# Altium PCB Insoladora.PcbDoc
Units mil, origin at the board's own origin, x right, y up, seen from the top; angles counter-clockwise.
Board outline 5900 x 4500 mil, 2 copper layers (Top Layer, Bottom Layer); 68 components, 52 nets, 136 pads, 4 vias.
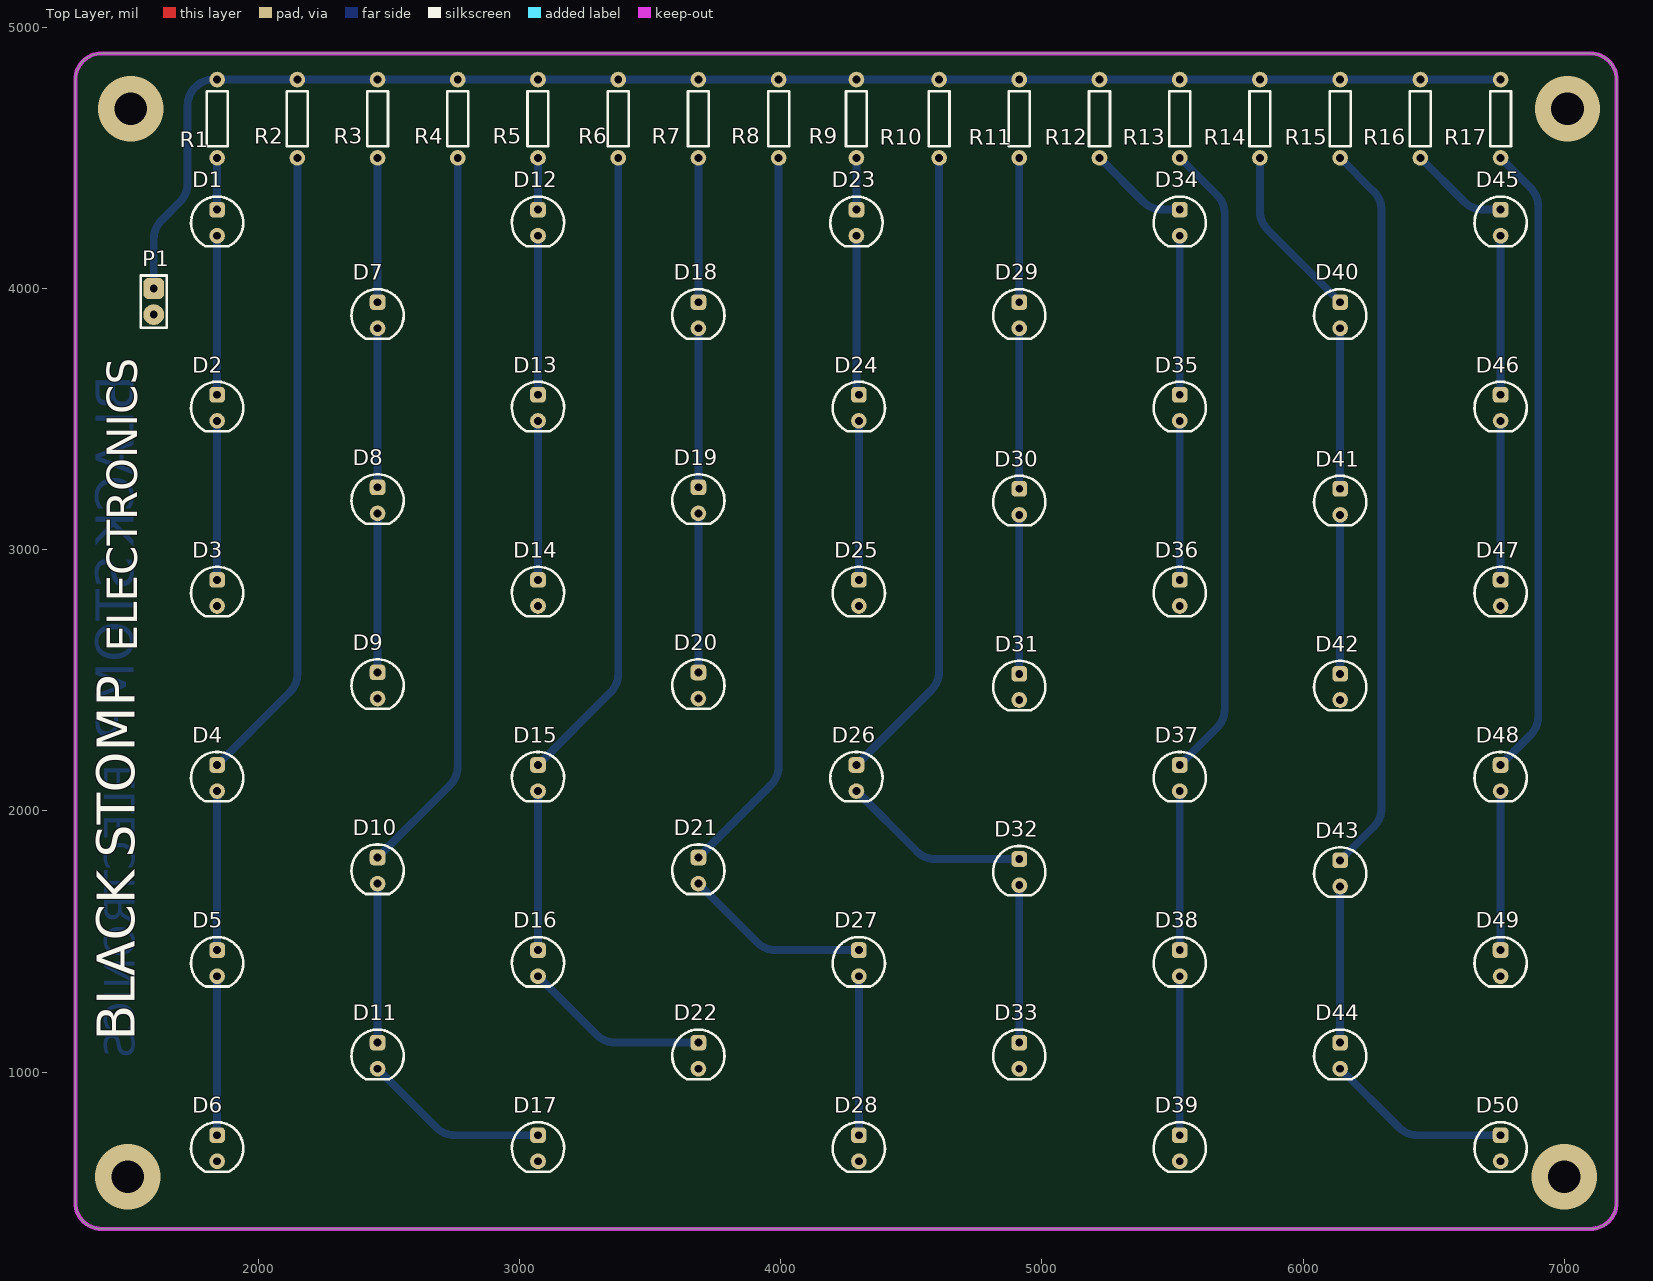
[diagram p0: Top Layer view]
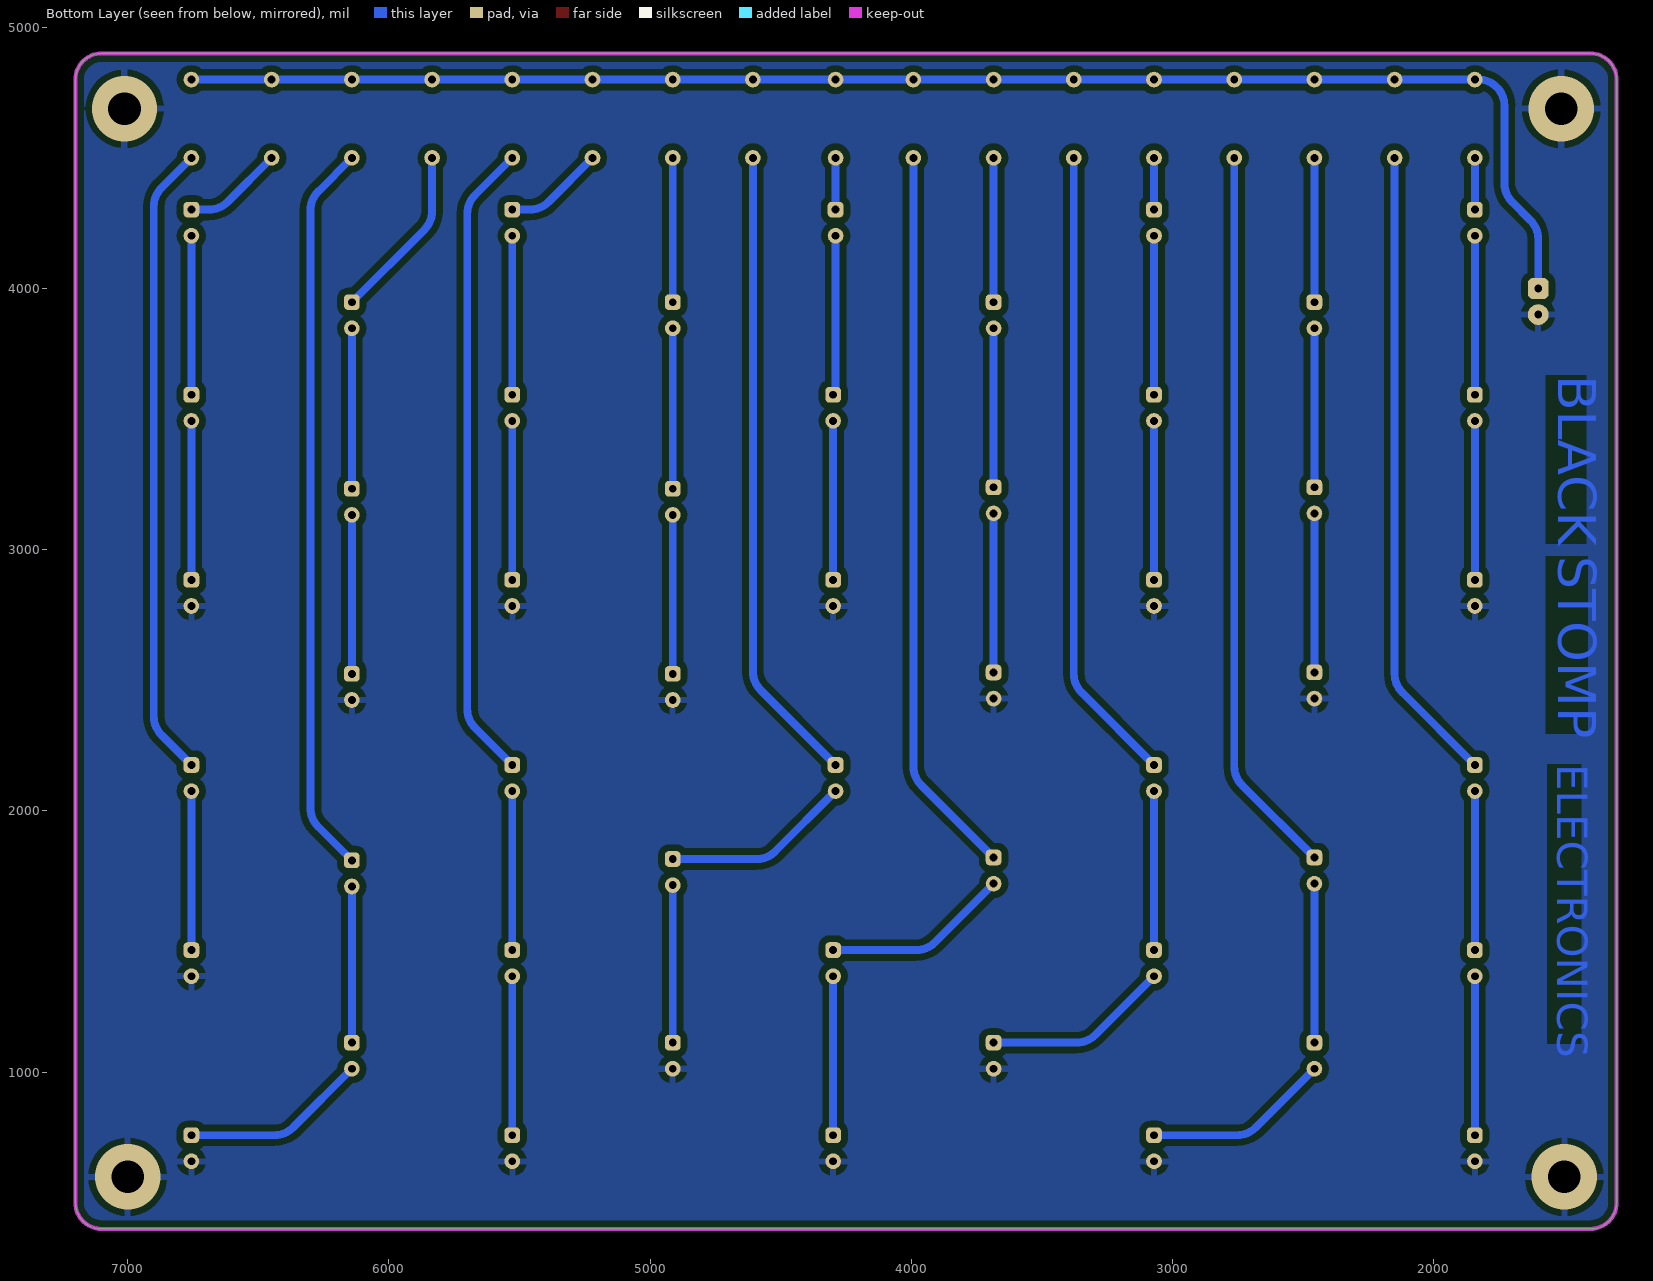
[diagram p1: Bottom Layer view, seen from below]

## Layer stack, top to bottom
Top Solder: solder mask 0.4, Solder Resist, Dk 3.5
Top Layer: signal copper 1.4
Dielectric 1: dielectric 12.6, FR-4, Dk 4.8
Bottom Layer: signal copper 1.4
Bottom Solder: solder mask 0.4, Solder Resist, Dk 3.5

## Board outline
7100,4900 cw(c7100,4800) 7200,4800 7200,500 cw(c7100,500) 7100,400 1400,400 cw(c1400,500) 1300,500 1300,4800 cw(c1400,4800) 1400,4900

## Design rules (kind name [scope] priority, off if disabled: settings)
Clearance [All] p1: gap=10 ignorepadtopadclearanceinfootprint=FALSE except(0: Arc-Hole Track-Hole SMDPad-Hole THPad-Hole Via-Hole Fill-Text Fill-Hole Poly-Text Poly-Hole Region-Text Region-Hole Text-Hole; 25: Arc-Fill Arc-Poly Arc-Region Track-Fill Track-Poly Track-Region THPad-Fill THPad-Poly THPad-Region Via-Fill Via-Poly Via-Region Fill-Fill Fill-Poly Fill-Region Poly-Poly Poly-Region Region-Region)
Height [All] p1: minheight=0 maxheight=2000 prefheight=500
PlaneClearance [All] p1: clearance=25
PlaneConnect [All] p1: planeconnectstyle=Relief reliefexpansion=20 reliefentries=4 reliefconductorwidth=25 reliefairgap=25
PolygonConnect [All] p1: connectstyle=Relief reliefconductorwidth=25 reliefentries=4 polygonreliefangle="90 Angle" airgapwidth=25
RoomDefinition Insoladora [InComponentClass('Insoladora')] p1: confinementstyle=ConfineIn formatcopy=TRUE lockcomponents=FALSE outline 1279.53,354.33 7283.46,354.33 7283.46,4965 1279.53,4965
RoutingLayers [All] p1: top layer_v5=FALSE bottom layer_v5=TRUE
RoutingVias [All] p1: holewidth=28 width=50 viastyle="Through Hole" minholewidth=28 minwidth=50 maxholewidth=28 maxwidth=50
SolderMaskExpansion [All] p1: expansion=4
Width [All] p1: maxlimit=50 minlimit=10 preferedwidth=30
26 further rules are at their usual default settings.

## Components (designator, comment, footprint, x,y, rotation, side; value= is the part's Value field where it differs from the comment)
D1 "LED2" "LED Clear" 1842.52,4251.97 r270 top
D2 "LED2" "LED Clear" 1842.52,3543.31 r270 top
D3 "LED2" "LED Clear" 1842.52,2834.65 r270 top
D4 "LED2" "LED Clear" 1842.52,2125.98 r270 top
D5 "LED2" "LED Clear" 1842.52,1417.32 r270 top
D6 "LED2" "LED Clear" 1842.52,708.66 r270 top
D7 "LED2" "LED Clear" 2456.69,3897.64 r270 top
D8 "LED2" "LED Clear" 2456.69,3188.98 r270 top
D9 "LED2" "LED Clear" 2456.69,2480.32 r270 top
D10 "LED2" "LED Clear" 2456.69,1771.65 r270 top
D11 "LED2" "LED Clear" 2456.69,1062.99 r270 top
D12 "LED2" "LED Clear" 3070.87,4251.97 r270 top
D13 "LED2" "LED Clear" 3070.87,3543.31 r270 top
D14 "LED2" "LED Clear" 3070.87,2834.65 r270 top
D15 "LED2" "LED Clear" 3070.87,2125.98 r270 top
D16 "LED2" "LED Clear" 3070.87,1417.32 r270 top
D17 "LED2" "LED Clear" 3070.87,708.66 r270 top
D18 "LED2" "LED Clear" 3685.04,3897.64 r270 top
D19 "LED2" "LED Clear" 3685.04,3188.98 r270 top
D20 "LED2" "LED Clear" 3685.04,2480.31 r270 top
D21 "LED2" "LED Clear" 3685.04,1771.65 r270 top
D22 "LED2" "LED Clear" 3685.04,1062.99 r270 top
D23 "LED2" "LED Clear" 4290,4251.97 r270 top
D24 "LED2" "LED Clear" 4299.21,3543.31 r270 top
D25 "LED2" "LED Clear" 4299.21,2834.65 r270 top
D26 "LED2" "LED Clear" 4290,2125.98 r270 top
D27 "LED2" "LED Clear" 4299.21,1417.32 r270 top
D28 "LED2" "LED Clear" 4299.21,708.66 r270 top
D29 "LED2" "LED Clear" 4913.39,3897.64 r270 top
D30 "LED2" "LED Clear" 4913.39,3183.42 r270 top
D31 "LED2" "LED Clear" 4913.39,2474.76 r270 top
D32 "LED2" "LED Clear" 4913.39,1766.1 r270 top
D33 "LED2" "LED Clear" 4913.39,1062.99 r270 top
D34 "LED2" "LED Clear" 5527.56,4251.97 r270 top
D35 "LED2" "LED Clear" 5527.56,3543.31 r270 top
D36 "LED2" "LED Clear" 5527.56,2834.65 r270 top
D37 "LED2" "LED Clear" 5527.56,2125.98 r270 top
D38 "LED2" "LED Clear" 5527.56,1417.32 r270 top
D39 "LED2" "LED Clear" 5527.56,708.66 r270 top
D40 "LED2" "LED Clear" 6141.73,3897.64 r270 top
D41 "LED2" "LED Clear" 6141.73,3183.42 r270 top
D42 "LED2" "LED Clear" 6141.73,2474.76 r270 top
D43 "LED2" "LED Clear" 6141.73,1760.78 r270 top
D44 "LED2" "LED Clear" 6141.73,1062.99 r270 top
D45 "LED2" "LED Clear" 6755.91,4251.97 r270 top
D46 "LED2" "LED Clear" 6755.91,3543.31 r270 top
D47 "LED2" "LED Clear" 6755.91,2834.65 r270 top
D48 "LED2" "LED Clear" 6755.91,2125.98 r270 top
D49 "LED2" "LED Clear" 6755.91,1417.32 r270 top
D50 "LED2" "LED Clear" 6755.91,708.66 r270 top
P1 "Header 2" "HEADER 2" 1600,4000 r270 top
R1 "Res1" "Res 0.3" 1842.52,4500 r90 top value=180
R2 "Res1" "Res 0.3" 2149.61,4500 r90 top value=180
R3 "Res1" "Res 0.3" 2456.69,4500 r90 top value=180
R4 "Res1" "Res 0.3" 2763.78,4500 r90 top value=180
R5 "Res1" "Res 0.3" 3070.87,4500 r90 top value=180
R6 "Res1" "Res 0.3" 3377.95,4500 r90 top value=180
R7 "Res1" "Res 0.3" 3685.04,4500 r90 top value=180
R8 "Res1" "Res 0.3" 3992.13,4500 r90 top value=180
R9 "Res1" "Res 0.3" 4290,4500 r90 top value=180
R10 "Res1" "Res 0.3" 4606.3,4500 r90 top value=180
R11 "Res1" "Res 0.3" 4913.39,4500 r90 top value=180
R12 "Res1" "Res 0.3" 5220.47,4500 r90 top value=180
R13 "Res1" "Res 0.3" 5527.56,4500 r90 top value=180
R14 "Res1" "Res 0.3" 5834.65,4500 r90 top value=180
R15 "Res1" "Res 0.3" 6141.73,4500 r90 top value=180
R16 "Res1" "Res 0.3" 6448.82,4500 r90 top value=180
R17 "Res1" "Res 0.3" 6755.91,4500 r90 top value=330

## Footprints (in the part's own frame and the unit in brackets; to place one, negate y for a bottom-side part, rotate by r counter-clockwise, add the part's x,y. Pads: shape width x height; smd on the part's side, far side on the other; paste and mask are expansions set on the pad)
"HEADER 2" [mil]
  rrect50% 80x80 hole 30: 1(0,0)
  round 80 hole 30: 2(100,0)
  silkscreen extent -50,-50 150,50, body extent -50,-50 150,50, height 400
"LED Clear" [mil]
  rrect50% 60x60 hole 30: 1(-50,0)
  round 60 hole 30: 2(50,0)
  silkscreen extent -100,-100 89,100, body extent -109,-109 110,109, height 457
"Res 0.3" [mil]
  round 60 hole 30: 1(0,0) 2(300,0)
  silkscreen extent 45,-40 255,40, body extent -10,-30 310,30, height 65

## Part data
D1 D2 D3 D4 D5 D6 D7 D8 D9 D10 D11 D12 D13 D14 D15 D16 D17 D18 D19 D20 D21 D22 D23 D24 D25 D26 D27 D28 D29 D30 D31 D32 D33 D34 D35 D36 D37 D38 D39 D40 D41 D42 D43 D44 D45 D46 D47 D48 D49 D50: "Typical RED, GREEN, YELLOW, AMBER GaAs LED", LatestRevisionDate=17-Jul-2002, LatestRevisionNote="Re-released for DXP Platform.", PackageDescription="SM LED; 2 Flat Leads", PackageReference=3.2X1.6X1.1, PackageVersion=Feb-2002, Published=8-Jun-2000, Publisher="Altium Limited"
P1: "Header, 2-Pin", LatestRevisionDate=17-Jul-2002, LatestRevisionNote="Re-released for DXP Platform.", Publisher="Altium Limited"
R1 R2 R3 R4 R5 R6 R7 R8 R9 R10 R11 R12 R13 R14 R15 R16 R17: "Resistor", LatestRevisionDate=17-Jul-2002, LatestRevisionNote="Re-released for DXP Platform.", PackageDescription="Axial Device, Thru-Hole; 2 Leads; 0.3 in Pin Spacing", PackageReference=AXIAL-0.3, Published=8-Jun-2000, Publisher="Altium Limited"

## Via types
v1: diameter 250, hole 125, Top Layer to Bottom Layer, 4 vias

## Nets (pads, with @x,y where several pads share a name; then routed paths per layer and width w, separated by ;. In a path a pad name is that pad's centre, name@x,y a point inside that pad or via, vN(x,y) a via of type N, cw(c..) or ccw(c..) an arc to the next point about the centre after c; other vN are vias at no path point)
GND: D3.2 D6.2 D9.2 D14.2 D17.2 D20.2 D22.2 D25.2 D28.2 D31.2 D33.2 D36.2 D39.2 D42.2 D47.2 D49.2 D50.2 P1.2
  other v1: 1500,599.05 7000,599.05 1511.81,4688.43 7011.81,4688.43
NetD1_1: D1.1 R1.1 | length 198
  Bottom Layer w30: D1.1 R1.1
NetD1_2: D1.2 D2.1 | length 608.7
  Bottom Layer w30: D2.1 D1.2
NetD2_2: D2.2 D3.1 | length 608.7
  Bottom Layer w30: D3.1 D2.2
NetD4_1: D4.1 R2.1 | length 2446.9
  Bottom Layer w30: D4.1 2120.32,2453.78 ccw(c2049.61,2524.49) 2149.61,2524.49 R2.1
NetD4_2: D4.2 D5.1 | length 608.7
  Bottom Layer w30: D5.1 D4.2
NetD5_2: D5.2 D6.1 | length 608.7
  Bottom Layer w30: D6.1 D5.2
NetD7_1: D7.1 R3.1 | length 552.4
  Bottom Layer w30: D7.1 R3.1
NetD7_2: D7.2 D8.1 | length 608.7
  Bottom Layer w30: D8.1 D7.2
NetD8_2: D8.2 D9.1 | length 608.7
  Bottom Layer w30: D9.1 D8.2
NetD10_1: D10.1 R4.1 | length 2801.2
  Bottom Layer w30: D10.1 2734.49,2099.45 ccw(c2663.78,2170.16) 2763.78,2170.16 R4.1
NetD10_2: D10.2 D11.1 | length 608.7
  Bottom Layer w30: D11.1 D10.2
NetD11_2: D11.2 D17.1 | length 715.2
  Bottom Layer w30: D11.2 2681.73,787.95 ccw(c2752.44,858.66) 2752.44,758.66 D17.1
NetD12_1: D12.1 R5.1 | length 198
  Bottom Layer w30: D12.1 R5.1
NetD12_2: D12.2 D13.1 | length 608.7
  Bottom Layer w30: D13.1 D12.2
NetD13_2: D13.2 D14.1 | length 608.7
  Bottom Layer w30: D14.1 D13.2
NetD15_1: D15.1 R6.1 | length 2446.9
  Bottom Layer w30: D15.1 3348.66,2453.78 ccw(c3277.95,2524.49) 3377.95,2524.49 R6.1
NetD15_2: D15.2 D16.1 | length 619.3
  Bottom Layer w30: D16.1 D15.2 D15.2@3070.87,2086.61
NetD16_2: D16.2 D22.1 | length 715.2
  Bottom Layer w30: D16.2 3295.91,1142.28 ccw(c3366.62,1212.99) 3366.62,1112.99 D22.1
NetD18_1: D18.1 R7.1 | length 552.4
  Bottom Layer w30: D18.1 R7.1
NetD18_2: D18.2 D19.1 | length 608.7
  Bottom Layer w30: D19.1 D18.2
NetD19_2: D19.2 D20.1 | length 608.7
  Bottom Layer w30: D20.1 D19.2
NetD21_1: D21.1 R8.1 | length 2801.2
  Bottom Layer w30: D21.1 3962.84,2099.45 ccw(c3892.13,2170.16) 3992.13,2170.16 R8.1
NetD21_2: D21.2 D27.1 | length 715.2
  Bottom Layer w30: D21.2 3910.08,1496.61 ccw(c3980.79,1567.32) 3980.79,1467.32 D27.1
NetD23_1: D23.1 R9.1 | length 198
  Bottom Layer w30: D23.1 R9.1
NetD23_2: D23.2 D24.1 | length 611.1
  Bottom Layer w30: D23.2 4290,3615.55 ccw(c4321.45,3615.55) D24.1
NetD24_2: D24.2 D25.1 | length 608.7
  Bottom Layer w30: D25.1 D24.2
NetD26_1: D26.1 R10.1 | length 2450.7
  Bottom Layer w30: D26.1 4577.01,2462.99 ccw(c4506.3,2533.7) 4606.3,2533.7 R10.1
NetD26_2: D26.2 D32.1 | length 726.7
  Bottom Layer w30: D26.2 4520.6,1845.39 ccw(c4591.31,1916.1) 4591.31,1816.1 D32.1
NetD27_2: D27.2 D28.1 | length 608.7
  Bottom Layer w30: D28.1 D27.2
NetD29_1: D29.1 R11.1 | length 552.4
  Bottom Layer w30: D29.1 R11.1
NetD29_2: D29.2 D30.1 | length 614.2
  Bottom Layer w30: D30.1 D29.2
NetD30_2: D30.2 D31.1 | length 608.7
  Bottom Layer w30: D31.1 D30.2
NetD32_2: D32.2 D33.1 | length 603.1
  Bottom Layer w30: D33.1 D32.2
NetD34_1: D34.1 R12.1 | length 384.8
  Bottom Layer w30: R12.1 5389.22,4331.26 ccw(c5459.93,4401.97) 5459.93,4301.97 D34.1
NetD34_2: D34.2 D35.1 | length 608.7
  Bottom Layer w30: D35.1 D34.2
NetD35_2: D35.2 D36.1 | length 608.7
  Bottom Layer w30: D36.1 D35.2
NetD37_1: D37.1 R13.1 | length 2458.3
  Bottom Layer w30: D37.1 5670.71,2319.13 ccw(c5600,2389.85) 5700,2389.85 5700,4286.14 ccw(c5600,4286.14) 5670.71,4356.85 R13.1
NetD37_2: D37.2 D38.1 | length 608.7
  Bottom Layer w30: D38.1 D37.2
NetD38_2: D38.2 D39.1 | length 608.7
  Bottom Layer w30: D39.1 D38.2
NetD40_1: D40.1 R14.1 | length 675.3
  Bottom Layer w30: R14.1 5834.65,4296.15 ccw(c5934.65,4296.15) 5863.94,4225.43 D40.1
NetD40_2: D40.2 D41.1 | length 614.2
  Bottom Layer w30: D41.1 D40.2
NetD41_2: D41.2 D42.1 | length 608.7
  Bottom Layer w30: D42.1 D41.2
NetD43_1: D43.1 R15.1 | length 2811.7
  Bottom Layer w30: D43.1 6270.71,1939.76 ccw(c6200,2010.47) 6300,2010.47 6300,4300.31 ccw(c6200,4300.31) 6270.71,4371.02 R15.1
NetD43_2: D43.2 D44.1 | length 597.8
  Bottom Layer w30: D44.1 D43.2
NetD44_2: D44.2 D50.1 | length 715.2
  Bottom Layer w30: D44.2 6366.77,787.95 ccw(c6437.48,858.66) 6437.48,758.66 D50.1
NetD45_1: D45.1 R16.1 | length 384.8
  Bottom Layer w30: R16.1 6617.56,4331.26 ccw(c6688.27,4401.97) 6688.27,4301.97 D45.1
NetD45_2: D45.2 D46.1 | length 608.7
  Bottom Layer w30: D46.1 D45.2
NetD46_2: D46.2 D47.1 | length 608.7
  Bottom Layer w30: D47.1 D46.2
NetD48_1: D48.1 R17.1 | length 2434.8
  Bottom Layer w30: D48.1 6870.71,2290.79 ccw(c6800,2361.5) 6900,2361.5 6900,4314.48 ccw(c6800,4314.48) 6870.71,4385.19 R17.1
NetD48_2: D48.2 D49.1 | length 608.7
  Bottom Layer w30: D49.1 D48.2
Vcc: P1.1 R1.2 R2.2 R3.2 R4.2 R5.2 R6.2 R7.2 R8.2 R9.2 R10.2 R11.2 R12.2 R13.2 R14.2 R15.2 R16.2 R17.2 | length 5828.6
  Bottom Layer w30: P1.1 1600,4189.84 cw(c1700,4189.84) 1629.29,4260.55 1700,4331.26 ccw(c1629.29,4401.97) 1729.29,4401.97 1729.29,4700 cw(c1829.29,4700) 1829.29,4800 R1.2 R2.2 R3.2 R4.2 R5.2 R6.2 R7.2 R8.2 R9.2 R10.2 R11.2 R12.2 R13.2 R14.2 R15.2 R16.2 R17.2

## Polygon pours and split planes (outlines as drawn)
GND on Bottom Layer "GroundFill" (solid, remove dead copper, pour order 0): 1300,400 7200,400 7200,4900 1300,4900

## Keep-outs
Keep-Out Layer:
  lines w8: 1296,500 ccw(c1400,500) 1400,396 7100,396 ccw(c7100,500) 7204,500 7204,4800 ccw(c7100,4800) 7100,4904 1400,4904 ccw(c1400,4800) 1296,4800 1296,500 ; 1304,500 ccw(c1400,500) 1400,404 7100,404 ccw(c7100,500) 7196,500 7196,4800 ccw(c7100,4800) 7100,4896 1400,4896 ccw(c1400,4800) 1304,4800 1304,500

## Other copper
Bottom Layer:
  text "BLACK" at 1571.81,3668.31 h250 r90
  text "STOMP" at 1571.81,2974.65 h250 r90
  text "ELECTRONICS" at 1565,2179.65 h200 r90

## Silkscreen, mask and mechanical layers (free items; w line width, h text height)
Top Overlay:
  text "ELECTRONICS" at 1575,2610 h200 r90
  text "STOMP" at 1575,1820.62 h250 r90
  text "BLACK" at 1575,1120 h250 r90